# Altium PCB USB2aer_def.PCBDOC (part 1 of 3)
Units mm, origin at the board's own origin, x right, y up, seen from the top; angles counter-clockwise.
Board outline 194.75 x 143.65 mm, 2 copper layers (TopLayer, BottomLayer); 106 components, 195 nets, 863 pads, 225 vias.
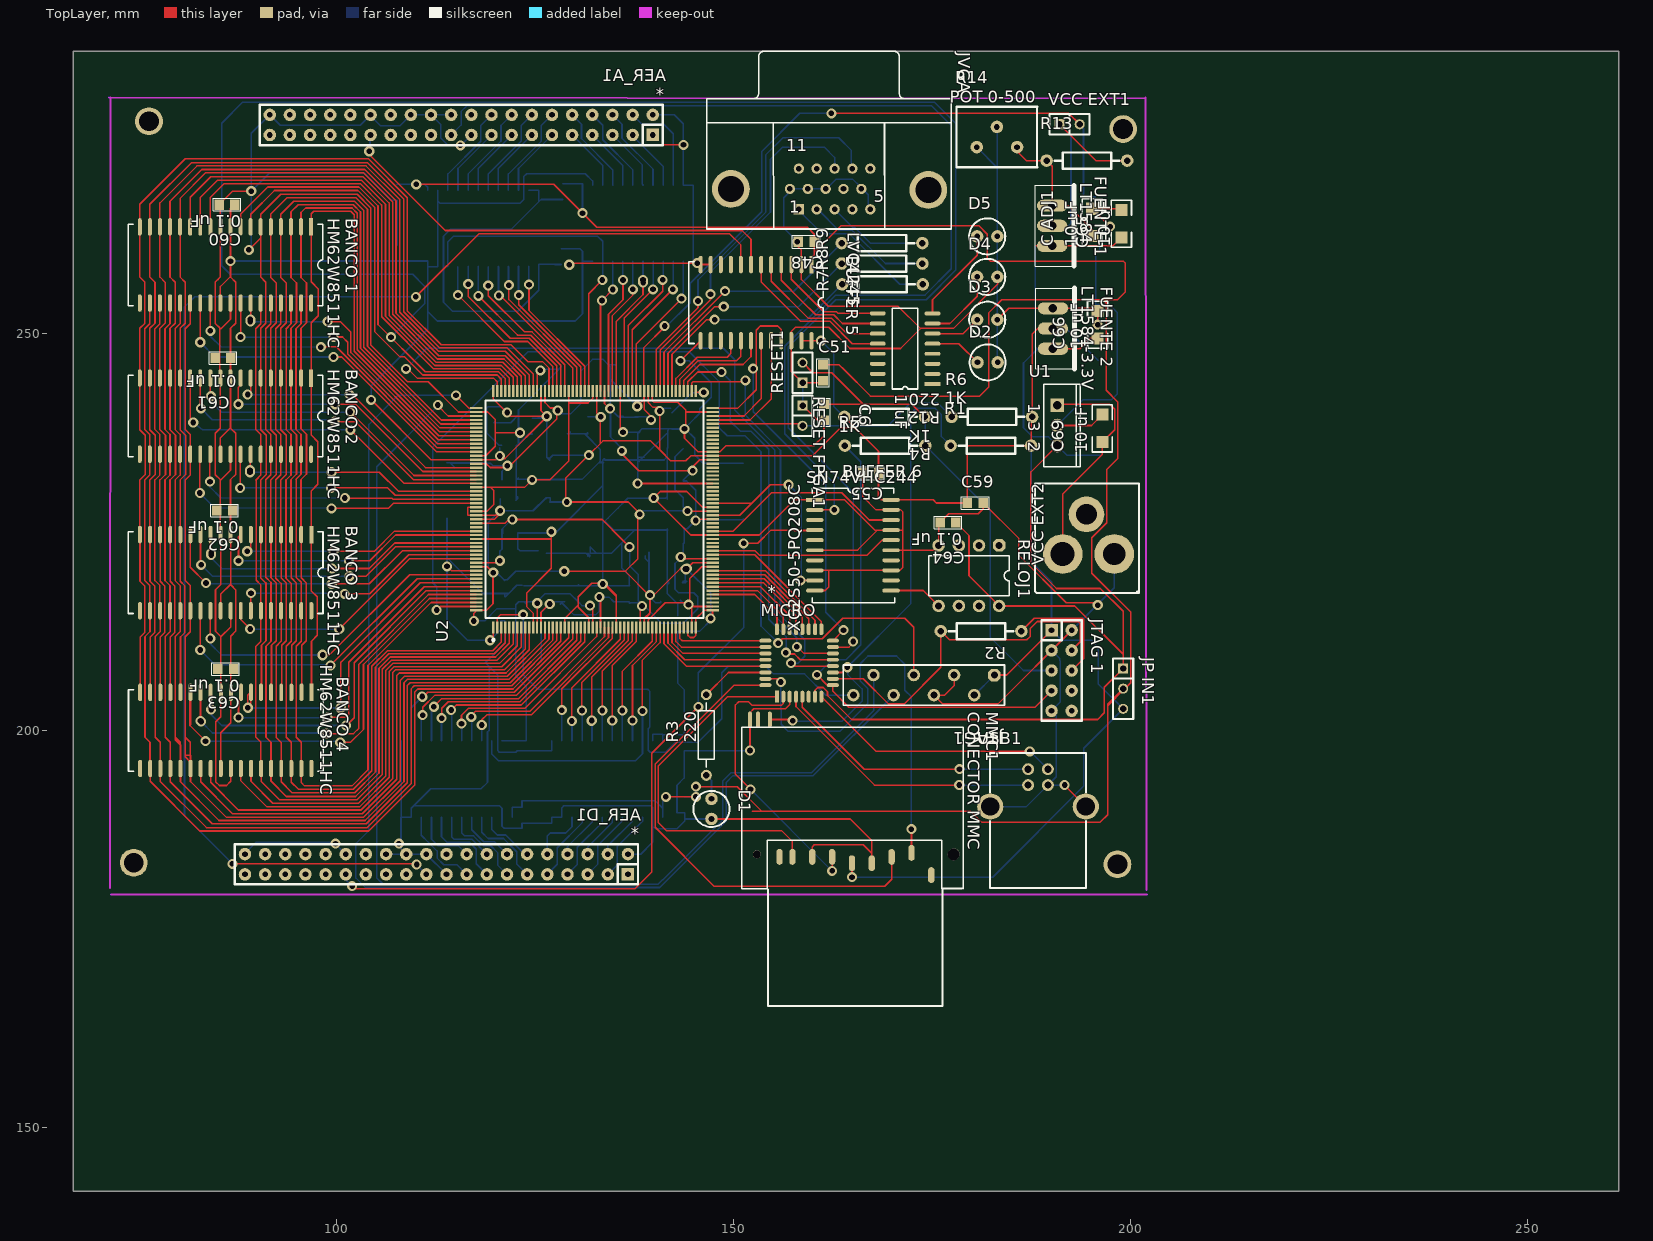
[diagram p0: TopLayer view]
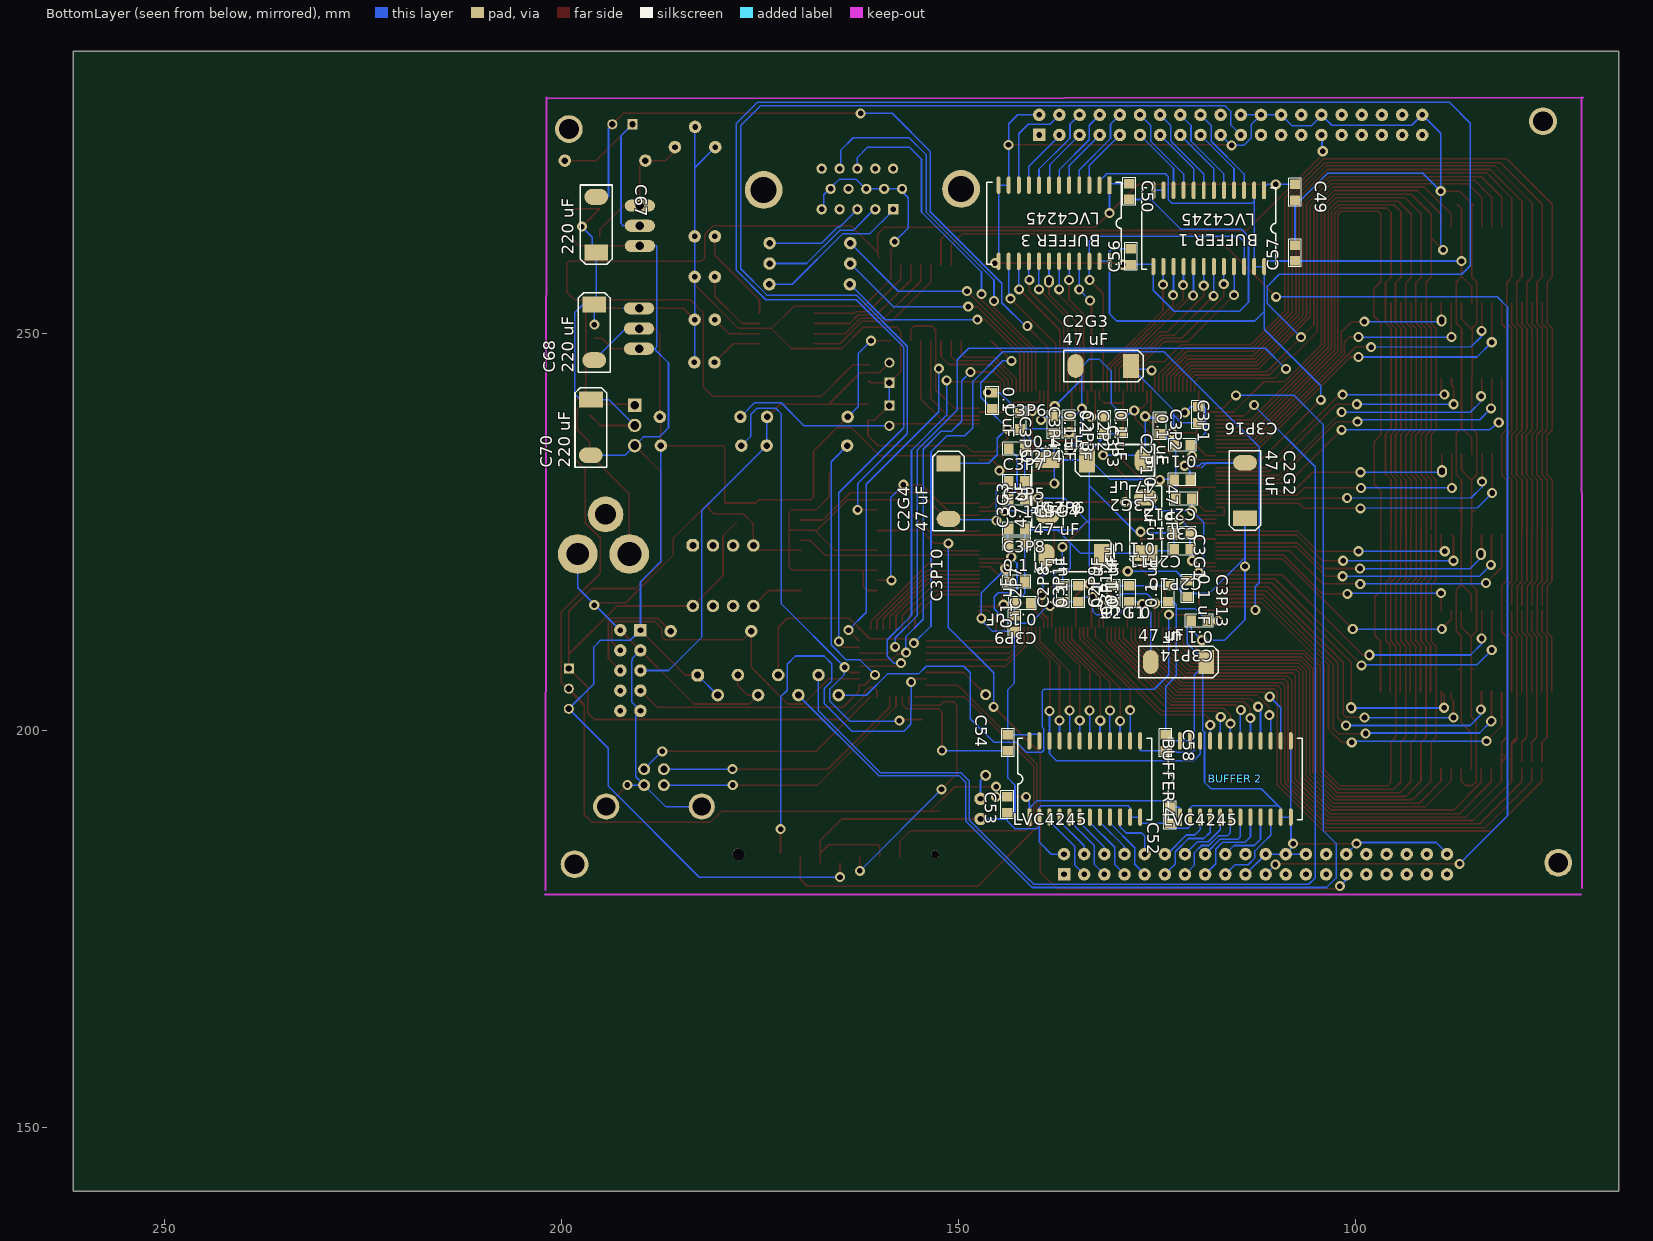
[diagram p1: BottomLayer view, seen from below]

## Layer stack, top to bottom
TopLayer: signal copper 0.0356
Dielectric: core 0.32, FR-4, Dk 4.8
BottomLayer: signal copper 0.0356

## Board outline
66.798,141.898 261.552,141.898 261.552,285.552 66.798,285.552

## Design rules (kind name [scope] priority, off if disabled: settings)
Clearance [All] p1 off: gap=0.203
Clearance Clearance_1 [All] p2: gap=0.2
ComponentClearance [All] p1: gap=0.254 collisioncheckmode=0
FanoutControl Fanout_Small [All] p1 off: bgadir=Out bgaviamode=Centered fanoutstyle=Auto fanoutdirection=Alternating viagrid=0.025 // Protel DXP Scope 1 Expression Was: (CompPinCount < 5)   Fanout_Small (Default Rule)
FanoutControl Fanout_Default [All] p2: bgadir=Out bgaviamode=Centered fanoutstyle=Auto fanoutdirection=Alternating viagrid=0.025 // Fanout_Default (Default Rule)
FanoutControl Fanout_SOIC [All] p3 off: bgadir=Out bgaviamode=Centered fanoutstyle=Auto fanoutdirection=Alternating viagrid=0.025 // Protel DXP Scope 1 Expression Was: IsSOIC   Fanout_SOIC (Default Rule)
FanoutControl Fanout_BGA [All] p4 off: bgadir=Out bgaviamode=Centered fanoutstyle=Auto fanoutdirection=Alternating viagrid=0.025 // Protel DXP Scope 1 Expression Was: IsBGA   Fanout_BGA (Default Rule)
FanoutControl Fanout_LCC [All] p5 off: bgadir=Out bgaviamode=Centered fanoutstyle=Auto fanoutdirection=Alternating viagrid=0.025 // Protel DXP Scope 1 Expression Was: IsLCC   Fanout_LCC (Default Rule)
PasteMaskExpansion PasteMaskExpansion_1 [All] p2: expansion=0
PlaneClearance PlaneClearance_1 [All] p1: clearance=0.508
PlaneClearance [All] p2: clearance=0.254
PolygonConnect [All] p1: connectstyle=Relief reliefconductorwidth=0.254 reliefentries=4 polygonreliefangle="90 Angle"
RoutingLayers [All] p1: top layer=Horizontal bottom layer=Vertical
RoutingVias [All] p1: holewidth=0.711 width=1.27 viastyle="Through Hole" minholewidth=0.711 minwidth=1.27 maxholewidth=0.711 maxwidth=1.27
ShortCircuit ShortCircuit_1 [All] p2: allowed=FALSE
SolderMaskExpansion SolderMaskExpansion_1 [All] p1: expansion=0.102
SolderMaskExpansion [All] p2: expansion=0.051
TestPointUsage [All] p1: valid=0 allowmultiple=FALSE
Testpoint [All] p1: side=7 testpointundercomponent=TRUE minsize=1.016 maxsize=2.54 preferedsize=1.524 minholesize=0.508 maxholesize=1.016 preferedholesize=0.813 testpointgrid=0.025 style=1001 order=1234567890
UnRoutedNet UnRoutedNet_1 [All] p2:
Width [All] p1: maxlimit=0.8 minlimit=0.2 preferedwidth=0.203 bottomlayer_prefwidth=0.2 minimp=50.000000 maximp=50.000000 favimp=50.000000
10 further rules are at their usual default settings.

## Classes and differential pairs
net class AEO[0..15]: AEO0 AEO1 AEO2 AEO3 AEO4 AEO5 AEO6 AEO7 AEO8 AEO9 AEO10 AEO11 AEO12 AEO13 AEO14 AEO15
component class U_SRAM_Module: "BANCO 1" "BANCO 2" "BANCO 3" "BANCO 4" C60 C61 C62 C63
net class MEM_D[0..31]: MEM_D0 MEM_D1 MEM_D2 MEM_D3 MEM_D4 MEM_D5 MEM_D6 MEM_D7 MEM_D8 MEM_D9 MEM_D10 MEM_D11 MEM_D12 MEM_D13 MEM_D14 MEM_D15 MEM_D16 MEM_D17 MEM_D18 MEM_D19 MEM_D20 MEM_D21 MEM_D22 MEM_D23 MEM_D24 MEM_D25 MEM_D26 MEM_D27 MEM_D28 MEM_D29 MEM_D30 MEM_D31
net class MEM_A[0..18]: MEM_A0 MEM_A1 MEM_A2 MEM_A3 MEM_A4 MEM_A5 MEM_A6 MEM_A7 MEM_A8 MEM_A9 MEM_A10 MEM_A11 MEM_A12 MEM_A13 MEM_A14 MEM_A15 MEM_A16 MEM_A17 MEM_A18
net class CYGNAL_D[0..7]: CYGNAL_D0 CYGNAL_D1 CYGNAL_D2 CYGNAL_D3 CYGNAL_D4 CYGNAL_D5 CYGNAL_D6 CYGNAL_D7
net class AEROUT[0..15]: AEROUT0 AEROUT1 AEROUT2 AEROUT3 AEROUT4 AEROUT5 AEROUT6 AEROUT7 AEROUT8 AEROUT9 AEROUT10 AEROUT11 AEROUT12 AEROUT13 AEROUT14 AEROUT15
net class AERIN[0..15]: AERIN0 AERIN1 AERIN2 AERIN3 AERIN4 AERIN5 AERIN6 AERIN7 AERIN8 AERIN9 AERIN10 AERIN11 AERIN12 AERIN13 AERIN14 AERIN15
component class U_fuente: C64 C65 C66 C67 C68 C69 C70 "C ADJ1" "FUENTE 1" "FUENTE 2" R13 R14 RELOJ1 U1 U4 "VCC EXT1" "VCC EXT2"
component class U_Cygnal: C6 D1 "JTAG 1" MICRO MMC1 R1 R2 R3 R4 R5 RESET1 USB1
component class AERout: AER_A1 AER_D1 "BUFFER 1" "BUFFER 2" "BUFFER 3" "BUFFER 4" "BUFFER 5" "BUFFER 6" C48 C49 C50 C51 C52 C53 C54 C55 C56 C57 C58 C59 D2 D3 D4 D5 "JP IN1" R12
component class U_FPGA: C2G1 C2G2 C2G3 C2G4 C2P1 C2P2 C2P3 C2P4 C2P5 C2P6 C2P7 C2P8 C2P9 C2P10 C2P11 C2P12 C3G1 C3G2 C3G3 C3G4 C3P1 C3P2 C3P3 C3P4 C3P5 C3P6 C3P7 C3P8 C3P9 C3P10 C3P11 C3P12 C3P13 C3P14 C3P15 C3P16 JTAG1 R6 "RESET FPGA1" U2
net class AEI[0..15]: AEI0 AEI1 AEI2 AEI3 AEI4 AEI5 AEI6 AEI7 AEI8 AEI9 AEI10 AEI11 AEI12 AEI13 AEI14 AEI15
component class U_VGA: JVGA R7 R8 R9

## Components (designator, comment, footprint, x,y, rotation, side; value= is the part's Value field where it differs from the comment)
AER_A1 "*" IDC-40 139.825,275.025 r180 top
AER_D1 "*" IDC-40 136.7,181.86 r180 top
"BANCO 1" "HM62W8511HC" SOJ36/400 96.775,263.45 r270 top
"BANCO 2" "HM62W8511HC" SOJ36/400 96.775,244.4 r270 top
"BANCO 3" "HM62W8511HC" SOJ36/400 96.8,224.675 r270 top
"BANCO 4" "HM62W8511HC" SOJ36/400 96.821,204.797 r270 top
"BUFFER 1" "LVC4245" SOJ24/400-THIN 111.475,268.05 r270 bottom
"BUFFER 2" "LVC4245" SOJ24/400-THIN 122.1,189.075 r90 bottom
"BUFFER 3" "LVC4245" SOJ24/400-THIN 130.975,268.7 r270 bottom
"BUFFER 4" "LVC4245" SOJ24/400-THIN 141.075,189.075 r90 bottom
"BUFFER 5" "LVC4245" SOJ24/400-THIN 159.825,258.7 r270 top
"BUFFER 6" "SN74VHC244" SOJ20/400-THIN 160.25,229.05 r0 top
C2G1 "47 uF" "CAPACITOR GRANDE 2" 122.275,208.625 r180 bottom locked
C2G2 "47 uF" "CAPACITOR GRANDE 2" 113.9,230.225 r270 bottom
C2G3 "47 uF" "CAPACITOR GRANDE 2" 131.745,245.925 r180 bottom locked
C2G4 "47 uF" "CAPACITOR GRANDE 2" 151.25,230.15 r90 bottom locked
C2P1 "0.1 uF" "CAP 10"#1 129.45,238.625 r270 bottom locked
C2P2 "0.1 uF" "CAP 10"#1 136.1,238.575 r270 bottom locked
C2P3 "0.1 uF" "CAP 10"#1 138.025,238.525 r270 bottom locked
C2P4 "0.1 uF" "CAP 10"#1 142.65,231.4 r180 bottom locked
C2P5 "0.1 uF" "CAP 10"#1 142.65,225.4 r180 bottom locked
C2P6 "0.1 uF" "CAP 10"#1 142.65,223.525 r180 bottom locked
C2P7 "0.1 uF" "CAP 10"#1 136.85,217.2 r90 bottom locked
C2P8 "0.1 uF" "CAP 10"#1 134.9,217.2 r90 bottom locked
C2P9 "0.1 uF" "CAP 10"#1 128.475,217.2 r90 bottom locked
C2P10 "0.1 uF" "CAP 10"#1 121.825,222.85 r0 bottom locked
C2P11 "0.1 uF" "CAP 10"#1 121.825,224.875 r0 bottom locked
C2P12 "0.1 uF" "CAP 10"#1 121.825,231.6 r0 bottom locked
C3G1 "47 uF" "CAPACITOR GRANDE 2" 126.399,225.834 r270 bottom locked
C3G2 "47 uF" "CAPACITOR GRANDE 2" 130.3,234.025 r0 bottom locked
C3G3 "47 uF" "CAPACITOR GRANDE 2" 138.775,230.575 r90 bottom locked
C3G4 "47 uF" "CAPACITOR GRANDE 2" 135.4,221.975 r180 bottom locked
C3P1 "0.1 uF" "CAP 10"#1 119.825,239.775 r270 bottom locked
C3P2 "0.1 uF" "CAP 10"#1 124.65,238.35 r270 bottom locked
C3P3 "0.1 uF" "CAP 10"#1 131.625,238.525 r270 bottom locked
C3P4 "0.1 uF" "CAP 10"#1 142.25,239.025 r270 bottom locked
C3P5 "0.1 uF" "CAP 10"#1 145.75,241.525 r270 bottom locked
C3P6 "0.1 uF" "CAP 10"#1 142.655,235.486 r180 bottom locked
C3P7 "0.1 uF" "CAP 10"#1 142.65,229.15 r180 bottom locked
C3P8 "0.1 uF" "CAP 10"#1 142.65,218.725 r180 bottom locked
C3P9 "0.1 uF" "CAP 10"#1 141.925,216.025 r0 bottom locked
C3P10 "0.1 uF" "CAP 10"#1 142.95,213.475 r90 bottom locked
C3P11 "0.1 uF" "CAP 10"#1 130.425,217.2 r90 bottom locked
C3P12 "0.1 uF" "CAP 10"#1 123.6,217.2 r90 bottom locked
C3P13 "0.1 uF" "CAP 10"#1 121.15,217.85 r270 bottom locked
C3P14 "0.1 uF" "CAP 10"#1 119.675,213.825 r0 bottom locked
C3P15 "0.1 uF" "CAP 10"#1 121.6,229.2 r0 bottom locked
C3P16 "0.1 uF" "CAP 10"#1 121.775,235.95 r0 bottom locked
C6 "1 uF" "CAP 10"#1 161.4,240.1 r270 top
C48 "0.1 uF" "CAP 10"#1 159.175,261.575 r180 top
C49 "0.1 uF" "CAP 10"#1 107.6,267.825 r270 bottom
C50 "0.1 uF" "CAP 10"#1 128.475,267.9 r270 bottom
C51 "0.1 uF" "CAP 10"#2 163.75,247.575 r90 top
C52 "0.1 uF" "CAP 10"#1 123.35,189.3 r270 bottom
C53 "0.1 uF" "CAP 10"#1 143.85,190.625 r270 bottom
C54 "0.1 uF" "CAP 10"#1 143.775,198.45 r270 bottom
C55 "0.1 uF" "CAP 10"#1 167.275,232.4 r180 top
C56 "0.1 uF" "CAP 10"#1 128.275,259.7 r270 bottom
C57 "0.1 uF" "CAP 10"#1 107.6,260.15 r90 bottom
C58 "0.1 uF" "CAP 10"#1 123.9,198.45 r270 bottom
C59 "0.1 uF" "CAP 10"#1 180.475,228.65 r0 top
C60 "0.1 uF" "CAP 10"#1 86.175,266.25 r180 top
C61 "0.1 uF" "CAP 10"#1 85.675,246.925 r180 top
C62 "0.1 uF" "CAP 10"#1 85.875,227.7 r180 top
C63 "0.1 uF" "CAP 10"#1 86,207.725 r180 top
C64 "0.1 uF" "CAP 10"#1 177.025,226.2 r180 top
C65 "10 uF" 1206(2) 198.875,262.125 r90 top
C66 "10 uF" 1206(2) 195.875,249.4 r90 top
C67 "220 uF" "CAPACITOR GRANDE 2" 195.65,263.725 r270 bottom
C68 "220 uF" "CAPACITOR GRANDE 2" 195.9,250.15 r90 bottom
C69 "10 uF" 1206(2) 196.475,236.35 r90 top
C70 "220 uF" "CAPACITOR GRANDE 2" 196.325,238.175 r90 bottom
"C ADJ1" "10 uF" 1206(2) 195.2,262.3 r90 top
D1 "" LED 147.225,191.375 r270 top
D2 "" LED 180.75,246.375 r0 top
D3 "" LED 180.7,251.75 r0 top
D4 "" LED 180.7,257.15 r0 top
D5 "" LED 180.7,262.25 r0 top
"FUENTE 1" "LT1584" TO-220 190.15,266.125 r270 top
"FUENTE 2" "LT1584-3.3V" TO-220 190.25,253.175 r270 top
"JP IN1" "" SIP-3 199.1,207.8 r270 top
JTAG1 "" JTAG-PCB 182.875,206.975 r180 top
"JTAG 1" "" IDC-10 190.075,212.625 r270 top
JVGA "Connector 15" VGACON 160.425,287.725 r0 top
MICRO "*" LQFP-32 154.775,205 r0 top
MMC1 "CONECTOR MMC" MMC_CON 174.925,200.375 r270 top
R1 "1 K" AXIAL-0.4#1 177.35,235.875 r0 top
R2 "1 K" AXIAL-0.4#1 186.275,212.5 r180 top
R3 "220" AXIAL-0.4#2 146.575,199.425 r90 top
R4 "1K" AXIAL-0.4#1 174.125,239.5 r180 top
R5 "1K" AXIAL-0.4#1 164.025,235.875 r0 top
R6 "1K" AXIAL-0.4#1 177.475,239.5 r0 top
R7 "440" AXIAL-0.4#3 173.85,256.2 r180 top
R8 "440" AXIAL-0.4#3 173.8,258.825 r180 top
R9 "440" AXIAL-0.4#3 173.8,261.4 r180 top
R12 "220" SOP16A 175.075,243.65 r180 top
R13 "" AXIAL-0.4#1 189.45,271.8 r0 top
R14 "POT 0-500" POT 180.65,273.5 r0 top
RELOJ1 "" DIP-8 183.475,223.3 r270 top
RESET1 "" SIP-2 158.7,243.8 r90 top
"RESET FPGA1" "" SIP-2 158.7,240.925 r270 top
U1 "L7805CV" TO220ABN 190.8,238.425 r270 top
U2 "XC2S50-5PQ208C" F-QFP28X28-G208/P.5N 132.495,227.866 r90 top
USB1 "" USB_CON 182.35,190.4 r0 top
"VCC EXT1" "" SIP-2 191.075,276.375 r0 top
"VCC EXT2" "" JACK_DC 191.475,222.225 r90 top

## Footprints (in the part's own frame and the unit in brackets; to place one, negate y for a bottom-side part, rotate by r counter-clockwise, add the part's x,y. Pads: shape width x height; smd on the part's side, far side on the other; paste and mask are expansions set on the pad)
1206(2) [mil]
  rect 60x60 smd: 1(0,0) 2(135,0)
  silkscreen extent -50,-50 185,50
AXIAL-0.4#1 [mil]
  round 62 hole 32: 1(0,0) 2(400,0)
  silkscreen extent 40,-40 360,40
AXIAL-0.4#2 [mil]
  round 55.12 hole 33.46: 1(-200,0) 2(200,0)
  silkscreen extent -160,-40 160,40
AXIAL-0.4#3 [mil]
  round 62 hole 32: 1(0.2,-0.13) 2(400.2,-0.13)
  silkscreen extent 40,-40 360,40
"CAP 10"#1 [mm]
  rect 1.2x1.3 smd: 1(-1,0) 2(1,0)
  silkscreen extent -1.75,-0.8 1.75,0.8
"CAP 10"#2 [mm]
  rect 1.2x1.3 smd: 1(-1.522,2.473) 2(-3.522,2.473)
  silkscreen extent -4.27,1.67 -0.77,3.27
"CAPACITOR GRANDE 2" [mm]
  oval 2x3 smd: 1(-3.5,0)
  rect 2x3 smd: 2(3.5,0)
  silkscreen extent -5,-2 5,2
DIP-8 [mil]
  oct 62x62 hole 35: 1(0,0)
  round 62 hole 35: 2(0,-100) 3(0,-200) 4(0,-300) 5(300,-300) 6(300,-200) 7(300,-100) 8(300,0)
  silkscreen extent 50,-350 250,50
F-QFP28X28-G208/P.5N [mm]
  rect 1.55x0.3 smd: 1(-14.9,12.75) 2(-14.9,12.25) 3(-14.9,11.75) 4(-14.9,11.25) 5(-14.9,10.75) 6(-14.9,10.25) 7(-14.9,9.75) 8(-14.9,9.25) 9(-14.9,8.75) 10(-14.9,8.25) 11(-14.9,7.75) 12(-14.9,7.25) 13(-14.9,6.75) 14(-14.9,6.25) 15(-14.9,5.75) 16(-14.9,5.25) 17(-14.9,4.75) 18(-14.9,4.25) 19(-14.9,3.75) 20(-14.9,3.25) 21(-14.9,2.75) 22(-14.9,2.25) 23(-14.9,1.75) 24(-14.9,1.25) 25(-14.9,0.75) 26(-14.9,0.25) 27(-14.9,-0.25) 28(-14.9,-0.75) 29(-14.9,-1.25) 30(-14.9,-1.75) 31(-14.9,-2.25) 32(-14.9,-2.75) 33(-14.9,-3.25) 34(-14.9,-3.75) 35(-14.9,-4.25) 36(-14.9,-4.75) 37(-14.9,-5.25) 38(-14.9,-5.75) 39(-14.9,-6.25) 40(-14.9,-6.75) 41(-14.9,-7.25) 42(-14.9,-7.75) 43(-14.9,-8.25) 44(-14.9,-8.75) 45(-14.9,-9.25) 46(-14.9,-9.75) 47(-14.9,-10.25) 48(-14.9,-10.75) 49(-14.9,-11.25) 50(-14.9,-11.75) 51(-14.9,-12.25) 52(-14.9,-12.75) 105(14.9,-12.75) 106(14.9,-12.25) 107(14.9,-11.75) 108(14.9,-11.25) 109(14.9,-10.75) 110(14.9,-10.25) 111(14.9,-9.75) 112(14.9,-9.25) 113(14.9,-8.75) 114(14.9,-8.25) 115(14.9,-7.75) 116(14.9,-7.25) 117(14.9,-6.75) 118(14.9,-6.25) 119(14.9,-5.75) 120(14.9,-5.25) 121(14.9,-4.75) 122(14.9,-4.25) 123(14.9,-3.75) 124(14.9,-3.25) 125(14.9,-2.75) 126(14.9,-2.25) 127(14.9,-1.75) 128(14.9,-1.25) 129(14.9,-0.75) 130(14.9,-0.25) 131(14.9,0.25) 132(14.9,0.75) 133(14.9,1.25) 134(14.9,1.75) 135(14.9,2.25) 136(14.9,2.75) 137(14.9,3.25) 138(14.9,3.75) 139(14.9,4.25) 140(14.9,4.75) 141(14.9,5.25) 142(14.9,5.75) 143(14.9,6.25) 144(14.9,6.75) 145(14.9,7.25) 146(14.9,7.75) 147(14.9,8.25) 148(14.9,8.75) 149(14.9,9.25) 150(14.9,9.75) 151(14.9,10.25) 152(14.9,10.75) 153(14.9,11.25) 154(14.9,11.75) 155(14.9,12.25) 156(14.9,12.75)
  rect 0.3x1.55 smd: 53(-12.75,-14.9) 54(-12.25,-14.9) 55(-11.75,-14.9) 56(-11.25,-14.9) 57(-10.75,-14.9) 58(-10.25,-14.9) 59(-9.75,-14.9) 60(-9.25,-14.9) 61(-8.75,-14.9) 62(-8.25,-14.9) 63(-7.75,-14.9) 64(-7.25,-14.9) 65(-6.75,-14.9) 66(-6.25,-14.9) 67(-5.75,-14.9) 68(-5.25,-14.9) 69(-4.75,-14.9) 70(-4.25,-14.9) 71(-3.75,-14.9) 72(-3.25,-14.9) 73(-2.75,-14.9) 74(-2.25,-14.9) 75(-1.75,-14.9) 76(-1.25,-14.9) 77(-0.75,-14.9) 78(-0.25,-14.9) 79(0.25,-14.9) 80(0.75,-14.9) 81(1.25,-14.9) 82(1.75,-14.9) 83(2.25,-14.9) 84(2.75,-14.9) 85(3.25,-14.9) 86(3.75,-14.9) 87(4.25,-14.9) 88(4.75,-14.9) 89(5.25,-14.9) 90(5.75,-14.9) 91(6.25,-14.9) 92(6.75,-14.9) 93(7.25,-14.9) 94(7.75,-14.9) 95(8.25,-14.9) 96(8.75,-14.9) 97(9.25,-14.9) 98(9.75,-14.9) 99(10.25,-14.9) 100(10.75,-14.9) 101(11.25,-14.9) 102(11.75,-14.9) 103(12.25,-14.9) 104(12.75,-14.9) 157(12.75,14.9) 158(12.25,14.9) 159(11.75,14.9) 160(11.25,14.9) 161(10.75,14.9) 162(10.25,14.9) 163(9.75,14.9) 164(9.25,14.9) 165(8.75,14.9) 166(8.25,14.9) 167(7.75,14.9) 168(7.25,14.9) 169(6.75,14.9) 170(6.25,14.9) 171(5.75,14.9) 172(5.25,14.9) 173(4.75,14.9) 174(4.25,14.9) 175(3.75,14.9) 176(3.25,14.9) 177(2.75,14.9) 178(2.25,14.9) 179(1.75,14.9) 180(1.25,14.9) 181(0.75,14.9) 182(0.25,14.9) 183(-0.25,14.9) 184(-0.75,14.9) 185(-1.25,14.9) 186(-1.75,14.9) 187(-2.25,14.9) 188(-2.75,14.9) 189(-3.25,14.9) 190(-3.75,14.9) 191(-4.25,14.9) 192(-4.75,14.9) 193(-5.25,14.9) 194(-5.75,14.9) 195(-6.25,14.9) 196(-6.75,14.9) 197(-7.25,14.9) 198(-7.75,14.9) 199(-8.25,14.9) 200(-8.75,14.9) 201(-9.25,14.9) 202(-9.75,14.9) 203(-10.25,14.9) 204(-10.75,14.9) 205(-11.25,14.9) 206(-11.75,14.9) 207(-12.25,14.9) 208(-12.75,14.9)
  silkscreen extent -16.62,-13.72 13.72,13.73
IDC-10 [mil]
  rect 62x62 hole 28: 1(0,0)
  round 62 hole 28: 2(0,100) 3(100,0) 4(100,100) 5(200,0) 6(200,100) 7(300,0) 8(300,100) 9(400,0) 10(400,100)
  silkscreen extent -50,-50 450,150
IDC-40 [mil]
  rect 62x62 hole 28: 1(0,0)
  round 62 hole 28: 2(0,-100) 3(100,0) 4(100,-100) 5(200,0) 6(200,-100) 7(300,0) 8(300,-100) 9(400,0) 10(400,-100) 11(500,0) 12(500,-100) 13(600,0) 14(600,-100) 15(700,0) 16(700,-100) 17(800,0) 18(800,-100) 19(900,0) 20(900,-100) 21(1000,0) 22(1000,-100) 23(1100,0) 24(1100,-100) 25(1200,0) 26(1200,-100) 27(1300,0) 28(1300,-100) 29(1400,0) 30(1400,-100) 31(1500,0) 32(1500,-100) 33(1600,0) 34(1600,-100) 35(1700,0) 36(1700,-100) 37(1800,0) 38(1800,-100) 39(1900,0) 40(1900,-100)
  silkscreen extent -50,-150 1950,50
JACK_DC [mm] "Conector de alimentación"
  round 5 hole 3: 1(0,0)
  round 5 hole 2.8: 2(0,-6.5)
  round 4.5 hole 2.6: 3(5,-3)
  silkscreen extent -4.9,-9.6 8.9,3.5
JTAG-PCB [mil]
  oct 62x62 hole 35: 1(0,0)
  round 62 hole 35: 2(100,100) 3(200,0) 4(300,100) 7(400,0) 13(500,100) 15(600,0) 19(700,100)
  silkscreen extent -50,-50 750,150
LED [mil]
  round 62 hole 28: A(0,0) K(100,0)
  silkscreen extent -39,-89 139,89
LQFP-32 [mm]
  rect 0.5x1.5 smd: 1(0.7,-0.75)
  oval 0.5x1.5 smd: 2(1.5,-0.75) 3(2.3,-0.75) 4(3.1,-0.75) 5(3.9,-0.75) 6(4.7,-0.75) 7(5.5,-0.75) 8(6.3,-0.75) 17(6.3,7.75) 18(5.5,7.75) 19(4.7,7.75) 20(3.9,7.75) 21(3.1,7.75) 22(2.3,7.75) 23(1.5,7.75) 24(0.7,7.75)
  oval 1.5x0.5 smd: 9(7.75,0.7) 10(7.75,1.5) 11(7.75,2.3) 12(7.75,3.1) 13(7.75,3.9) 14(7.75,4.7) 15(7.75,5.5) 16(7.75,6.3) 25(-0.75,6.3) 26(-0.75,5.5) 27(-0.75,4.7) 28(-0.75,3.9) 29(-0.75,3.1) 30(-0.75,2.3) 31(-0.75,1.5) 32(-0.75,0.7)
MMC_CON [mm]
  round 1.5 hole 1.5: 0(16,2.8)
  round 1 hole 1: 0(16,-22)
  oval 2x0.8 smd: 1(15.81,-2.5) 2(16.31,-5) 3(17.11,-7.5) 4(17.11,-10) 5(16.31,-12.5) 6(16.31,-15) 7(16.31,-17.5) 8(16.31,-19.125) 9(18.61,0)
  oval 2x0.5 smd: 10(-1,-22.85) 11(-1,-21.85) 12(-1,-20.35)
  silkscreen extent 0,-23.88 35.1,4
POT [mil]
  round 62 hole 28: 1(0,0) 2(200,0) 3(100,100)
  silkscreen extent -100,-100 300,200
SIP-2 [mil]
  rect 50x50 hole 32: 1(0,0)
  round 50 hole 32: 2(100,0)
  silkscreen extent -50,-50 150,50
SIP-3 [mil]
  rect 50x50 hole 32: 1(0,0)
  round 50 hole 32: 2(100,0) 3(200,0)
  silkscreen extent -50,-50 250,50
SOJ20/400-THIN [mm]
  rect 2.2x0.5 smd: 1(0,0)
  oval 2.2x0.5 smd: 2(0,-1.27) 3(0,-2.54) 4(0,-3.81) 5(0,-5.08) 6(0,-6.35) 7(0,-7.62) 8(0,-8.89) 9(0,-10.16) 10(0,-11.43) 11(9.6,-11.43) 12(9.6,-10.16) 13(9.6,-8.89) 14(9.6,-7.62) 15(9.6,-6.35) 16(9.6,-5.08) 17(9.6,-3.81) 18(9.6,-2.54) 19(9.6,-1.27) 20(9.6,0)
  silkscreen extent -0.34,-12.99 10.06,1.47
SOJ24/400-THIN [mm]
  rect 2.2x0.5 smd: 1(0,0)
  oval 2.2x0.5 smd: 2(0,-1.27) 3(0,-2.54) 4(0,-3.81) 5(0,-5.08) 6(0,-6.35) 7(0,-7.62) 8(0,-8.89) 9(0,-10.16) 10(0,-11.43) 11(0,-12.7) 12(0,-13.97) 13(9.6,-13.97) 14(9.6,-12.7) 15(9.6,-11.43) 16(9.6,-10.16) 17(9.6,-8.89) 18(9.6,-7.62) 19(9.6,-6.35) 20(9.6,-5.08) 21(9.6,-3.81) 22(9.6,-2.54) 23(9.6,-1.27) 24(9.6,0)
  silkscreen extent -0.34,-15.44 9.95,1.47
SOJ36/400 [mm]
  rect 2.2x0.5 smd: 1(0,0)
  oval 2.2x0.5 smd: 2(0,-1.27) 3(0,-2.54) 4(0,-3.81) 5(0,-5.08) 6(0,-6.35) 7(0,-7.62) 8(0,-8.89) 9(0,-10.16) 10(0,-11.43) 11(0,-12.7) 12(0,-13.97) 13(0,-15.24) 14(0,-16.51) 15(0,-17.78) 16(0,-19.05) 17(0,-20.32) 18(0,-21.59) 19(9.6,-21.59) 20(9.6,-20.32) 21(9.6,-19.05) 22(9.6,-17.78) 23(9.6,-16.51) 24(9.6,-15.24) 25(9.6,-13.97) 26(9.6,-12.7) 27(9.6,-11.43) 28(9.6,-10.16) 29(9.6,-8.89) 30(9.6,-7.62) 31(9.6,-6.35) 32(9.6,-5.08) 33(9.6,-3.81) 34(9.6,-2.54) 35(9.6,-1.27) 36(9.6,0)
  silkscreen extent -0.34,-23.06 9.95,1.47
SOP16A [mm]
  rect 2x0.5 smd: 1(0,0)
  oval 2x0.5 smd: 2(0,-1.27) 3(0,-2.54) 4(0,-3.81) 5(0,-5.08) 6(0,-6.35) 7(0,-7.62) 8(0,-8.89) 9(6.9,-8.89) 10(6.9,-7.62) 11(6.9,-6.35) 12(6.9,-5.08) 13(6.9,-3.81) 14(6.9,-2.54) 15(6.9,-1.27) 16(6.9,0)
  silkscreen extent 1.83,-9.53 5.06,0.64
TO220ABN [mm] "TO, Thru-Hole, Vertical, Heatsink Mounted; 3 In-Line Leads; Pitch 2.54 mm; Pin sequence 1, 3, 2"
  rect 1.7x1.7 hole 1.1: 1(-2.54,0)
  round 1.7 hole 1.1: 2(2.54,0) 3(0,0)
  silkscreen extent -5.2,-1.7 5.2,2.9
TO-220 [mil]
  oval 60x150 hole 42: 1(0,0) 2(100,0) 3(200,0)
  silkscreen extent -100,-85 300,108
USB_CON [mm]
  round 1.5 hole 0.92: 1(7.27,4.71) 2(4.77,4.71) 3(4.77,2.71) 4(7.27,2.71)
  round 3.3 hole 2.3: 5(0,0) 6(12.04,0)
  silkscreen extent 0,-10.28 12.04,6.72
VGACON [mm] "Conector VGA"
  rect 1.3x1.3 hole 0.7: 1(-2.188,-22.063)
  round 1.3 hole 0.7: 2(0.062,-22.063) 3(2.313,-22.063) 4(4.563,-22.063) 5(6.813,-22.063) 6(-3.313,-19.5) 7(-1.062,-19.5) 8(1.188,-19.5) 9(3.437,-19.5) 10(5.687,-19.5) 11(-2.188,-16.937) 12(0.062,-16.937) 13(2.313,-16.937) 14(4.563,-16.937) 15(6.813,-16.937)
  round 4.76 hole 3.26: 16(-10.75,-19.5) 17(14.125,-19.625)
  silkscreen extent -13.79,-24.54 17.01,-2.14

## Part data
AER_A1 AER_D1: library part CON_AER1
"BUFFER 1" "BUFFER 2" "BUFFER 3" "BUFFER 4" "BUFFER 5": library part SN74LVC4245DW, "Octal Bus Transceiver and 3.3-V to 5-V Shifter with 3-State Outputs"
"BUFFER 6": library part SN74HC244, "OCTAL BUF AND LIN DRV 3SO"
C2G1 C2G2 C2G3 C2G4 C3G1 C3G2 C3G3 C3G4 C65 C66 C67 C68 C69 C70 "C ADJ1": library part "CAPACITOR POL", "Capacitor"
C2P1 C2P2 C2P3 C2P4 C2P5 C2P6 C2P7 C2P8 C2P9 C2P10 C2P11 C2P12 C3P1 C3P2 C3P3 C3P4 C3P5 C3P6 C3P7 C3P8 C3P9 C3P10 C3P11 C3P12 C3P13 C3P14 C3P15 C3P16 C6 C48 C49 C50 C51 C52 C53 C54 C55 C56 C57 C58 C59 C60 C61 C62 C63 C64: library part CAP, "Capacitor"
D1 D2 D3 D4 D5: library part LED
"JP IN1": library part CON3, "Connector"
JTAG1: library part JTAG
"JTAG 1": library part CON10, "Connector"
JVGA: "Receptacle Assembly, 15-Pin Connector"
MICRO: library part C8051F320
MMC1: library part CON12, "Connector"
R1 R2 R3 R4 R5 R6 R7 R8 R9 R13: library part RES1
R12: library part RESPACK2
R14: library part POT2, "Potentiometer"
RELOJ1: library part "OSCILADOR 50 MHZ"
RESET1 "RESET FPGA1": library part SW-PB
U1: "Positive Voltage Regulator"
U2: "Spartan-II 2.5V Field Programmable Gate Array"
USB1: library part CON6, "Connector"
"VCC EXT1" "VCC EXT2": library part CON2, "Connector"

## Free pads (board coordinates)
  round 3.5 hole 2.5 mask+0.2: 0(74.425,183.325) 0(76.35,276.75) 0(198.375,183.125) 0(199.1,275.775)

## Via types
v1: diameter 1.27, hole 0.711, TopLayer to BottomLayer, 225 vias

## Nets (pads, with @x,y where several pads share a name; then routed paths per layer and width w, separated by ;. In a path a pad name is that pad's centre, name@x,y a point inside that pad or via, vN(x,y) a via of type N, cw(c..) or ccw(c..) an arc to the next point about the centre after c; other vN are vias at no path point)
ACK_IN: "BUFFER 5.17" U2.109 | length 12.3
  TopLayer w0.203: U2.109@143.245,242.766 143.245,244.27 145.575,246.6 150.4,246.6 150.935,247.135 150.935,249.1
ACK_OUT: "BUFFER 6.16" U2.68 | length 23.5
  TopLayer w0.203: U2.68@147.395,222.616 152.75,222.616 153.316,222.05 166.8,222.05 168.72,223.97 169.85,223.97
ACKI: "BUFFER 5.7" AER_A1.29 | length 58.1
  TopLayer w0.203: v1@104.2,272.475 113.68,262.995 151.08,262.995 152.205,261.87 152.205,258.7
  BottomLayer w0.203: v1@104.2,272.475 AER_A1.29@104.2,275
  other v1: 104.1,272.975
ACKO: "BUFFER 6.4" AER_D1.29 | length 99.1
  TopLayer w0.203: v1(101.95,180.375) 102.275,180.05 137.6,180.05 139.707,182.157 139.707,197.111 v1(145.567,202.971) ; v1(151.275,223.575) 153.05,223.575 154.715,225.24 160.25,225.24 ; 157.65,225.175 160.26,225.175
  BottomLayer w0.2: AER_D1.29@101.14,181.86 101.14,181.185 v1(101.95,180.375) ; v1(145.567,202.971) 145.567,207.264 151.275,212.972 v1(151.275,223.575)
AEI0: "BUFFER 1.4" AER_A1.17 | length 8.7
  BottomLayer w0.2: 115.285,268.05 115.285,270.815 119.5,275.03 AER_A1.17@119.505,275.035
AEI1: "BUFFER 1.6" AER_A1.15 | length 8.7
  BottomLayer w0.2: 117.825,268.05 117.825,270.815 122.04,275.03 AER_A1.15@122.045,275.035
AEI2: "BUFFER 1.8" AER_A1.13 | length 8.7
  BottomLayer w0.2: 120.365,268.05 120.365,270.815 124.58,275.03 AER_A1.13@124.585,275.035
AEI3: "BUFFER 1.10" AER_A1.11 | length 8.7
  BottomLayer w0.2: 122.905,268.05 122.905,270.815 127.12,275.03 AER_A1.11@127.125,275.035
AEI4: "BUFFER 3.3" AER_A1.9 | length 7.9
  BottomLayer w0.2: AER_A1.9@129.665,275.035 129.67,275.03 133.515,271.185 133.515,268.7
AEI5: "BUFFER 3.5" AER_A1.7 | length 7.9
  BottomLayer w0.2: AER_A1.7@132.205,275.035 132.21,275.03 136.055,271.185 136.055,268.7
AEI6: "BUFFER 3.7" AER_A1.5 | length 8
  BottomLayer w0.2: AER_A1.5@134.745,275.035 134.75,275.03 138.525,271.255 138.525,268.8 ; 138.575,268.75 138.525,268.8 ; 138.595,268.7 138.595,268.73 138.525,268.8
AEI7: "BUFFER 3.9" AER_A1.3 | length 8
  BottomLayer w0.2: AER_A1.3@137.285,275.035 AER_A1.3@137.285,275.025 137.285,274.915 141.15,271.05 141.15,268.7 141.15,268.675
AEI8: "BUFFER 3.10" AER_A1.4 | length 12.6
  BottomLayer w0.2: AER_A1.4@137.285,277.565 138.468,276.382 141.218,276.382 142.405,275.195 142.405,268.7 ; AER_A1.4@137.285,277.575 AER_A1.4@137.29,277.57
AEI9: "BUFFER 3.8" AER_A1.6 | length 11
  BottomLayer w0.2: AER_A1.6@134.745,277.575 134.75,277.57 135.945,276.375 135.945,274.63 139.85,270.725 139.85,268.7 139.85,268.675
AEI10: "BUFFER 3.6" AER_A1.8 | length 11
  BottomLayer w0.2: AER_A1.8@132.205,277.575 132.21,277.57 133.525,276.255 133.525,274.425 137.325,270.625 137.325,268.7
AEI11: "BUFFER 3.4" AER_A1.10 | length 11
  BottomLayer w0.2: AER_A1.10@129.665,277.575 129.67,277.57 130.85,276.39 130.85,274.575 134.8,270.625 134.8,268.715 134.785,268.7
AEI12: "BUFFER 1.9" AER_A1.12 | length 11.8
  BottomLayer w0.2: 121.635,268.05 121.635,270.111 125.8,274.276 125.8,276.25 127.12,277.57 AER_A1.12@127.125,277.575
AEI13: "BUFFER 1.7" AER_A1.14 | length 11.8
  BottomLayer w0.2: 119.095,268.05 119.095,270.111 123.275,274.291 123.275,276.265 124.58,277.57 AER_A1.14@124.585,277.575
AEI14: "BUFFER 1.5" AER_A1.16 | length 11.8
  BottomLayer w0.2: 116.555,268.05 116.555,270.111 120.7,274.256 120.7,276.23 122.04,277.57 AER_A1.16@122.045,277.575
AEI15: "BUFFER 1.3" AER_A1.18 | length 11.8
  BottomLayer w0.2: 114.015,268.05 114.015,270.111 118.15,274.246 118.15,276.22 119.5,277.57 AER_A1.18@119.505,277.575
AEO0: "BUFFER 2.10" AER_D1.17 | length 10.6
  BottomLayer w0.2: 110.67,189.075 110.67,186.78 111.573,185.878 112.65,184.8 112.65,183.925 113.5,183.075 115.165,183.075 AER_D1.17@116.38,181.86
AEO1: "BUFFER 2.8" AER_D1.15 | length 11.2
  BottomLayer w0.2: 113.21,189.075 113.21,186.59 113.9,185.9 116.725,185.9 117.6,185.025 117.6,183.18 AER_D1.15@118.92,181.86
AEO2: "BUFFER 2.6" AER_D1.13 | length 11.7
  BottomLayer w0.2: 115.75,189.075 115.75,187.075 116.125,186.7 117.25,186.7 118.45,185.5 ; 119.325,185.5 118.45,185.5 ; AER_D1.13@121.46,181.86 120.275,183.045 120.275,184.6 119.35,185.525 118.475,185.525 118.45,185.5
AEO3: "BUFFER 2.4" AER_D1.11 | length 10.7
  BottomLayer w0.2: 118.29,189.075 118.29,187.16 119.075,186.375 121.025,186.375 122.7,184.7 122.7,183.16 AER_D1.11@124,181.86
AEO4: "BUFFER 4.9" AER_D1.9 | length 9
  BottomLayer w0.2: AER_D1.9@126.54,181.86 127.8,183.12 127.8,185.225 130.915,188.34 130.915,189.075
AEO5: "BUFFER 4.7" AER_D1.7 | length 9
  BottomLayer w0.2: AER_D1.7@129.08,181.86 130.325,183.105 130.325,185.275 133.455,188.405 133.455,189.075
AEO6: "BUFFER 4.5" AER_D1.5 | length 9
  BottomLayer w0.2: AER_D1.5@131.62,181.86 132.875,183.115 132.875,185.45 135.995,188.57 135.995,189.075
AEO7: "BUFFER 4.3" AER_D1.3 | length 9
  BottomLayer w0.2: AER_D1.3@134.16,181.86 135.35,183.05 135.35,185.375 138.535,188.56 138.535,189.075
AEO8: "BUFFER 4.4" AER_D1.4 | length 6
  BottomLayer w0.2: AER_D1.4@134.16,184.4 134.16,185.46 137.265,188.565 137.265,189.075
AEO9: "BUFFER 4.6" AER_D1.6 | length 6
  BottomLayer w0.2: AER_D1.6@131.62,184.4 131.62,185.295 134.725,188.4 134.725,189.075
AEO10: "BUFFER 4.8" AER_D1.8 | length 6
  BottomLayer w0.2: AER_D1.8@129.08,184.4 129.08,185.355 132.185,188.46 132.185,189.075
AEO11: "BUFFER 4.10" AER_D1.10 | length 7.1
  BottomLayer w0.2: AER_D1.10@126.54,184.4 126.54,186.69 126.925,187.075 128.85,187.075 129.645,187.87 129.645,189.075
AEO12: "BUFFER 2.3" AER_D1.12 | length 7.3
  BottomLayer w0.2: 119.56,189.075 119.56,187.49 120.235,186.815 121.285,186.815 123.7,184.4 AER_D1.12@124,184.4
AEO13: "BUFFER 2.5" AER_D1.14 | length 7.3
  BottomLayer w0.2: 117.02,189.075 117.02,187.496 118.541,185.975 119.885,185.975 AER_D1.14@121.46,184.4
AEO14: "BUFFER 2.7" AER_D1.16 | length 7.8
  BottomLayer w0.2: 114.48,189.075 114.48,186.57 114.75,186.3 117.02,186.3 AER_D1.16@118.92,184.4
AEO15: "BUFFER 2.9" AER_D1.18 | length 8
  BottomLayer w0.2: 111.94,189.075 111.94,186.285 112.725,185.5 115.28,185.5 AER_D1.18@116.38,184.4
AERIN0: "BUFFER 1.20" U2.140 | length 23.9
  TopLayer w0.203: v1(116.575,256.225) 116.575,254.679 121.85,249.404 124.271,249.404 127.745,245.93 U2.140@127.745,242.766
  BottomLayer w0.2: 116.555,258.45 116.555,256.245 v1(116.575,256.225) 116.575,258.43
AERIN1: "BUFFER 1.18" U2.138 | length 20.3
  TopLayer w0.203: v1(119.1,256.05) 119.1,254.775 123.625,250.25 123.625,250.211 124.614,250.211 128.745,246.08 U2.138@128.745,242.766
  BottomLayer w0.2: v1(119.1,256.05) 119.1,258.445
AERIN2: "BUFFER 1.16" U2.135 | length 21.5
  TopLayer w0.203: v1(121.7,256.1) 121.7,254.3 130.245,245.755 U2.135@130.245,242.766
  BottomLayer w0.2: 121.635,258.45 121.635,256.165 v1(121.7,256.1) 121.7,258.385
AERIN3: "BUFFER 1.14" U2.133 | length 20.8
  TopLayer w0.203: v1(124.225,256.175) 124.225,252.92 131.245,245.9 U2.133@131.245,242.766
  BottomLayer w0.2: 124.175,258.45 124.175,256.225 v1(124.225,256.175) 124.225,258.4
AERIN4: "BUFFER 3.21" U2.129 | length 18.9
  TopLayer w0.203: U2.129@133.245,242.766 133.245,253.995 v1(133.426,254.176) v1(134.8,255.55)
  BottomLayer w0.2: v1(133.426,254.176) v1(134.8,255.55) 134.785,255.565 134.785,259.1
AERIN5: "BUFFER 3.19" U2.126 | length 17.4
  TopLayer w0.203: U2.126@134.745,242.766 134.745,252.27 137.325,254.85 v1(137.325,255.575)
  BottomLayer w0.2: v1(137.325,255.575) 137.325,259.1
AERIN6: "BUFFER 3.17" U2.123 | length 17.8
  TopLayer w0.203: U2.123@136.245,242.766 136.245,251.97 v1(139.85,255.575)
  BottomLayer w0.2: v1(139.85,255.575) 139.865,255.59 139.865,259.1
AERIN7: "BUFFER 3.15" U2.121 | length 18.5
  TopLayer w0.203: U2.121@137.245,242.766 137.245,250.47 v1(142.35,255.575)
  BottomLayer w0.2: v1(142.35,255.575) 142.405,255.63 142.405,259.1
AERIN8: "BUFFER 3.14" U2.120 | length 18.9
  TopLayer w0.203: U2.120@137.745,242.766 137.745,248.695 143.35,254.3 v1@143.575,254.3
  BottomLayer w0.2: v1@143.575,254.3 143.675,254.4 143.675,259.1
  other v1: 143.45,254.4
AERIN9: "BUFFER 3.16" U2.122 | length 18.2
  TopLayer w0.203: U2.122@136.745,242.766 136.745,251.02 141.075,255.35 v1(141.075,256.775)
  BottomLayer w0.2: v1(141.075,256.775) 141.135,256.835 141.135,259.1
AERIN10: "BUFFER 3.18" U2.125 | length 18.1
  TopLayer w0.203: U2.125@135.245,242.766 135.245,251.57 138.6,254.925 v1@138.6,256.431 ; v1(138.6,256.775) 138.6,256.438 v1@138.6,256.431 ; v1(138.608,256.438) v1@138.6,256.431
  BottomLayer w0.2: 138.595,259.1 138.595,256.78 v1(138.6,256.775) 138.608,256.767 v1(138.608,256.438)
AERIN11: "BUFFER 3.20" U2.127 | length 17.1
  TopLayer w0.203: U2.127@134.245,242.766 134.245,252.42 136.075,254.25 v1(136.075,256.75)
  BottomLayer w0.2: 136.055,259.1 136.055,256.77 v1(136.075,256.75)
AERIN12: "BUFFER 1.15" U2.134 | length 22.5
  TopLayer w0.203: v1(122.95,254.85) 122.95,253.625 130.745,245.83 U2.134@130.745,242.766
  BottomLayer w0.2: 122.905,258.45 122.905,254.895 v1(122.95,254.85) 122.95,258.405
AERIN13: "BUFFER 1.17" U2.136 | length 23.3
  TopLayer w0.203: v1(120.425,254.8) 120.6,254.8 129.745,245.655 U2.136@129.745,242.766
  BottomLayer w0.2: 120.365,258.45 120.365,254.86 v1(120.425,254.8) 120.425,258.39
AERIN14: "BUFFER 1.19" U2.139 | length 24.7
  TopLayer w0.203: v1(117.85,254.75) 122.775,249.825 122.775,249.807 124.443,249.807 128.245,246.005 U2.139@128.245,242.766
  BottomLayer w0.2: 117.825,258.45 117.825,254.775 v1(117.85,254.75) 117.85,258.425
AERIN15: "BUFFER 1.21" U2.141 | length 22.4
  TopLayer w0.203: v1(115.275,254.85) 121.124,249.001 124.074,249.001 127.245,245.83 U2.141@127.245,242.766
  BottomLayer w0.2: v1(115.275,254.85) 115.275,258.44
AEROUT0: "BUFFER 2.15" U2.21 | length 28.2
  TopLayer w0.203: v1(110.825,201.925) 110.825,202.9 112.33,204.405 122.63,204.405 129.745,211.52 U2.21@129.745,212.966
  BottomLayer w0.2: 110.67,198.675 110.67,201.77 v1(110.825,201.925)
AEROUT1: "BUFFER 2.17" U2.23 | length 26.9
  TopLayer w0.203: v1(113.225,201.55) 113.225,202.775 114.049,203.599 123.099,203.599 130.745,211.245 U2.23@130.745,212.966
  BottomLayer w0.2: 113.21,198.675 113.21,201.535 v1(113.225,201.55)
AEROUT2: "BUFFER 2.19" U2.27 | length 25.5
  TopLayer w0.203: v1(115.725,200.85) 115.725,201.9 116.617,202.792 123.717,202.792 132.745,211.82 U2.27@132.745,212.966
  BottomLayer w0.2: v1(115.725,200.85) 115.75,200.825 115.75,198.675
AEROUT3: "BUFFER 2.21" U2.30 | length 24.2
  TopLayer w0.203: v1(118.275,200.675) 118.275,201.325 118.936,201.986 124.536,201.986 134.245,211.695 U2.30@134.245,212.966
  BottomLayer w0.2: v1(118.275,200.675) 118.3,200.65 118.3,198.775 118.29,198.775 118.29,198.675
AEROUT4: "BUFFER 4.15" U2.33 | length 19.3
  TopLayer w0.203: v1(129.625,201.175) 129.625,205.35 135.745,211.47 U2.33@135.745,212.966
  BottomLayer w0.2: v1(129.625,201.175) 129.625,198.695 129.645,198.675 v1@129.645,201.155
AEROUT5: "BUFFER 4.17" U2.35 | length 18.8
  TopLayer w0.203: v1(132.131,201.219) 132.131,201.231 v1(132.15,201.25) 132.15,206.735 136.745,211.33 U2.35@136.745,212.966
  BottomLayer w0.2: v1(132.131,201.219) v1@132.15,201.238 ; v1(132.15,201.25) v1@132.15,201.238 ; v1@132.185,201.215 132.185,198.675 132.15,198.71 132.15,201.219 v1@132.15,201.238
AEROUT6: "BUFFER 4.19" U2.37 | length 15.5
  TopLayer w0.203: v1(134.725,201.25) 134.725,208.169 137.745,211.189 U2.37@137.745,212.966
  BottomLayer w0.2: 134.725,198.675 v1(134.725,201.25)
AEROUT7: "BUFFER 4.21" U2.42 | length 18.1
  TopLayer w0.203: v1(137.275,201.25) 137.275,208.18 140.245,211.15 U2.42@140.245,212.966
  BottomLayer w0.2: v1@137.265,201.24 137.265,198.675 137.275,198.685 v1(137.275,201.25)
AEROUT8: "BUFFER 4.20" U2.41 | length 19.7
  TopLayer w0.203: v1(136,202.489) v1(136,202.5) 136,207.475 139.745,211.22 U2.41@139.745,212.966
  BottomLayer w0.2: v1@135.995,202.47 135.995,198.675 136,198.68 v1(136,202.489) v1(136,202.5)
AEROUT9: "BUFFER 4.18" U2.36 | length 19.7
  TopLayer w0.203: v1(133.475,202.5) 133.475,207.489 137.245,211.259 U2.36@137.245,212.966
  BottomLayer w0.2: v1@133.455,202.48 133.455,198.675 133.475,198.695 v1(133.475,202.5)
AEROUT10: "BUFFER 4.16" U2.34 | length 16.5
  TopLayer w0.203: v1(130.9,202.5) 130.9,206.055 136.245,211.4 U2.34@136.245,212.966
  BottomLayer w0.2: v1(130.9,202.5) 130.915,202.485 130.915,198.675
AEROUT11: "BUFFER 4.14" U2.31 | length 16.9
  TopLayer w0.203: v1(128.375,202.55) 128.375,205.255 134.745,211.625 U2.31@134.745,212.966
  BottomLayer w0.2: 128.375,198.675 v1(128.375,202.55)
AEROUT12: "BUFFER 2.20" U2.29 | length 25.3
  TopLayer w0.203: v1(116.95,201.7) 116.95,201.875 117.464,202.389 124.314,202.389 133.745,211.82 U2.29@133.745,212.966
  BottomLayer w0.2: v1(116.95,201.7) 117,201.65 117,198.775 117.02,198.755 117.02,198.675
AEROUT13: "BUFFER 2.18" U2.24 | length 26.1
  TopLayer w0.203: v1(114.425,202.575) 115.046,203.196 123.271,203.196 131.245,211.17 U2.24@131.245,212.966
  BottomLayer w0.2: v1(114.425,202.575) 114.48,202.52 114.48,198.675
AEROUT14: "BUFFER 2.16" U2.22 | length 28.9
  TopLayer w0.203: v1(112.25,202.975) v1@112.175,202.975 ; U2.22@130.245,212.966 130.245,211.345 122.902,204.002 113.202,204.002 112.213,203.012 v1@112.175,202.975 ; v1@112.175,202.975 112.125,202.925 v1@112.175,202.975
  BottomLayer w0.2: 111.94,198.675 v1@111.94,202.665 ; v1@112.475,202.975 v1@112.475,202.75 ; v1@111.94,202.665 112.25,202.665 112.415,202.665 112.475,202.725 v1@112.475,202.75 ; v1@111.94,202.665 v1(112.25,202.975) v1@112.475,202.75
AEROUT15: "BUFFER 2.14" U2.20 | length 31.1
  TopLayer w0.203: v1(110.769,204.267) 110.8,204.236 v1(110.8,204.225) 110.8,204.15 110.837,204.187 110.843,204.193 111.458,204.808 122.383,204.808 129.245,211.67 U2.20@129.245,212.966
  BottomLayer w0.2: 109.4,198.675 109.4,202.825 ; v1(110.769,204.267) 110.764,204.261 109.4,202.897 109.4,202.825 ; v1(110.8,204.225) 109.4,202.825
AUX0: MICRO.18 U2.63 | length 16.6
  TopLayer w0.203: U2.63@147.395,220.116 154.034,220.116 160.275,213.875 MICRO.18@160.275,212.75
AUX1: MICRO.17 U2.67 | length 18.1
  TopLayer w0.203: U2.67@147.395,222.116 152.659,222.116 161.075,213.7 MICRO.17@161.075,212.75
CCLK: MICRO.14 U2.155 | length 100.4
  TopLayer w0.203: v1@108.864,245.669 110.185,244.348 119.812,244.348 120.245,243.915 U2.155@120.245,242.766 ; v1@158.1,210.475 158.875,209.7 MICRO.14@162.525,209.7
  BottomLayer w0.2: v1@108.864,245.669 111.354,248.158 148.717,248.158 150.165,246.71 150.165,240.385 155.175,235.375 155.175,214.475 157.975,211.675 v1(157.975,210.525)
  other v1: 108.725,245.55
CLK: "BUFFER 6.9" U2.77 U2.80 | length 30.6
  TopLayer w0.203: U2.77@147.395,227.116 150.791,227.116 154.625,230.95 v1(156.95,230.95) ; U2.80@147.395,228.616 152.291,228.616 ; v1(158.45,218.9) 160.24,218.9
  BottomLayer w0.2: v1(156.95,230.95) 158.55,229.35 158.55,219 v1(158.45,218.9)
CYGNAL_CK: MICRO.27 U2.46 | length 14.2
  TopLayer w0.203: U2.46@142.245,212.966 142.245,211.08 143.625,209.7 MICRO.27@154.025,209.7
CYGNAL_D0: MICRO.26 U2.47 | length 13.3
  TopLayer w0.203: U2.47@142.745,212.966 142.745,211.205 143.45,210.5 MICRO.26@154.025,210.5
CYGNAL_D1: MICRO.25 U2.48 | length 12.3
  TopLayer w0.203: U2.48@143.245,212.966 143.245,211.58 143.525,211.3 MICRO.25@154.025,211.3
CYGNAL_D2: MICRO.24 U2.57 | length 10.8
  TopLayer w0.203: U2.57@147.395,217.116 152.659,217.116 155.475,214.3 MICRO.24@155.475,212.75
CYGNAL_D3: MICRO.23 U2.58 | length 11.8
  TopLayer w0.203: U2.58@147.395,217.616 153.034,217.616 156.275,214.375 MICRO.23@156.275,212.75
CYGNAL_D4: MICRO.22 U2.59 | length 12.9
  TopLayer w0.203: U2.59@147.395,218.116 153.409,218.116 157.075,214.45 MICRO.22@157.075,212.75
CYGNAL_D5: MICRO.21 U2.60 | length 13.9
  TopLayer w0.203: U2.60@147.395,218.616 153.784,218.616 157.875,214.525 MICRO.21@157.875,212.75
CYGNAL_D6: MICRO.20 U2.61 | length 14.8
  TopLayer w0.203: U2.61@147.395,219.116 153.859,219.116 158.675,214.3 MICRO.20@158.675,212.75
CYGNAL_D7: MICRO.19 U2.62 | length 15.7
  TopLayer w0.203: U2.62@147.395,219.616 153.929,219.616 159.475,214.07 MICRO.19@159.475,212.75
CYGNAL_DC: MICRO.28 U2.45 | length 15.1
  TopLayer w0.203: U2.45@141.745,212.966 141.745,211.005 143.85,208.9 MICRO.28@154.025,208.9
CYGNAL_RW: MICRO.29 U2.44 | length 16
  TopLayer w0.203: U2.44@141.245,212.966 141.245,210.905 144.05,208.1 MICRO.29@154.025,208.1
DONE: "BUFFER 5.21" MICRO.16 U2.104 | length 58.5
  TopLayer w0.203: U2.104@147.395,240.616 150.559,240.616 152.85,242.907 152.85,250.425 153.375,250.95 155.575,250.95 156.015,250.51 156.015,249.1 ; MICRO.16@162.525,211.3 v1@163.925,212.7
  BottomLayer w0.2: v1(152.475,245.575) 152.475,240.15 161.625,231 161.625,214.88 v1(163.865,212.64)